# EAGLE board AD8232_Heart_Rate_Monitor-Panel-v10_WINDOW_PANNED_PASTE (EAGLE 7.6.0), part 1 of 2
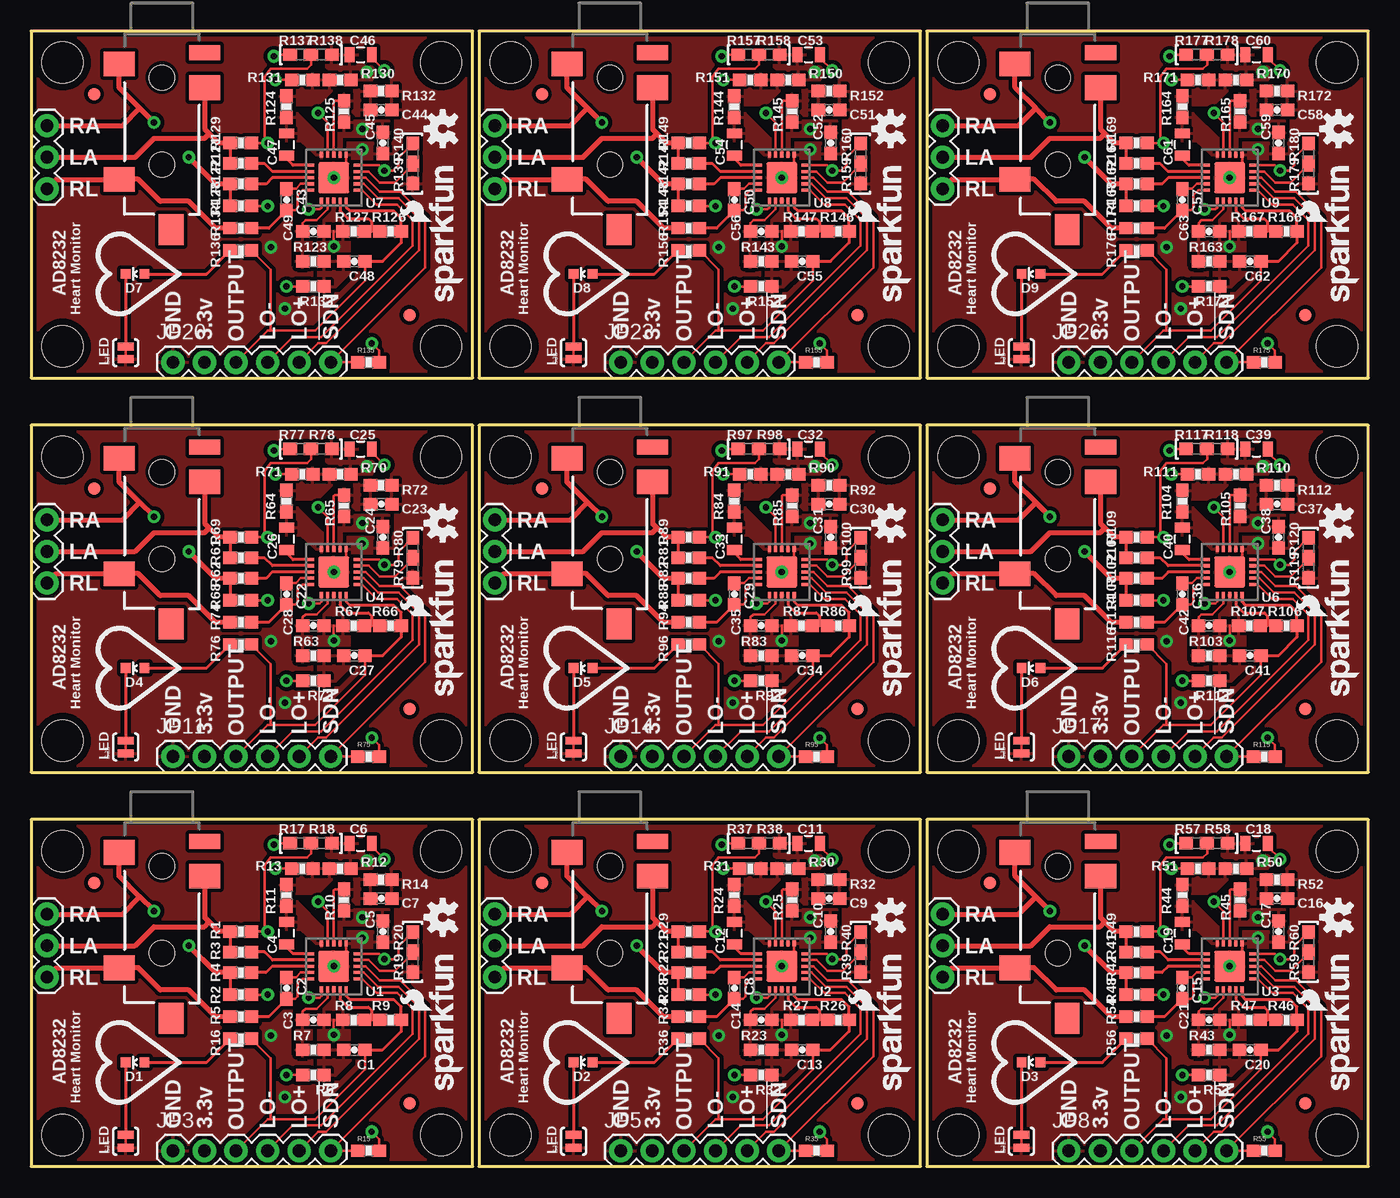
[diagram p0: board, top side]
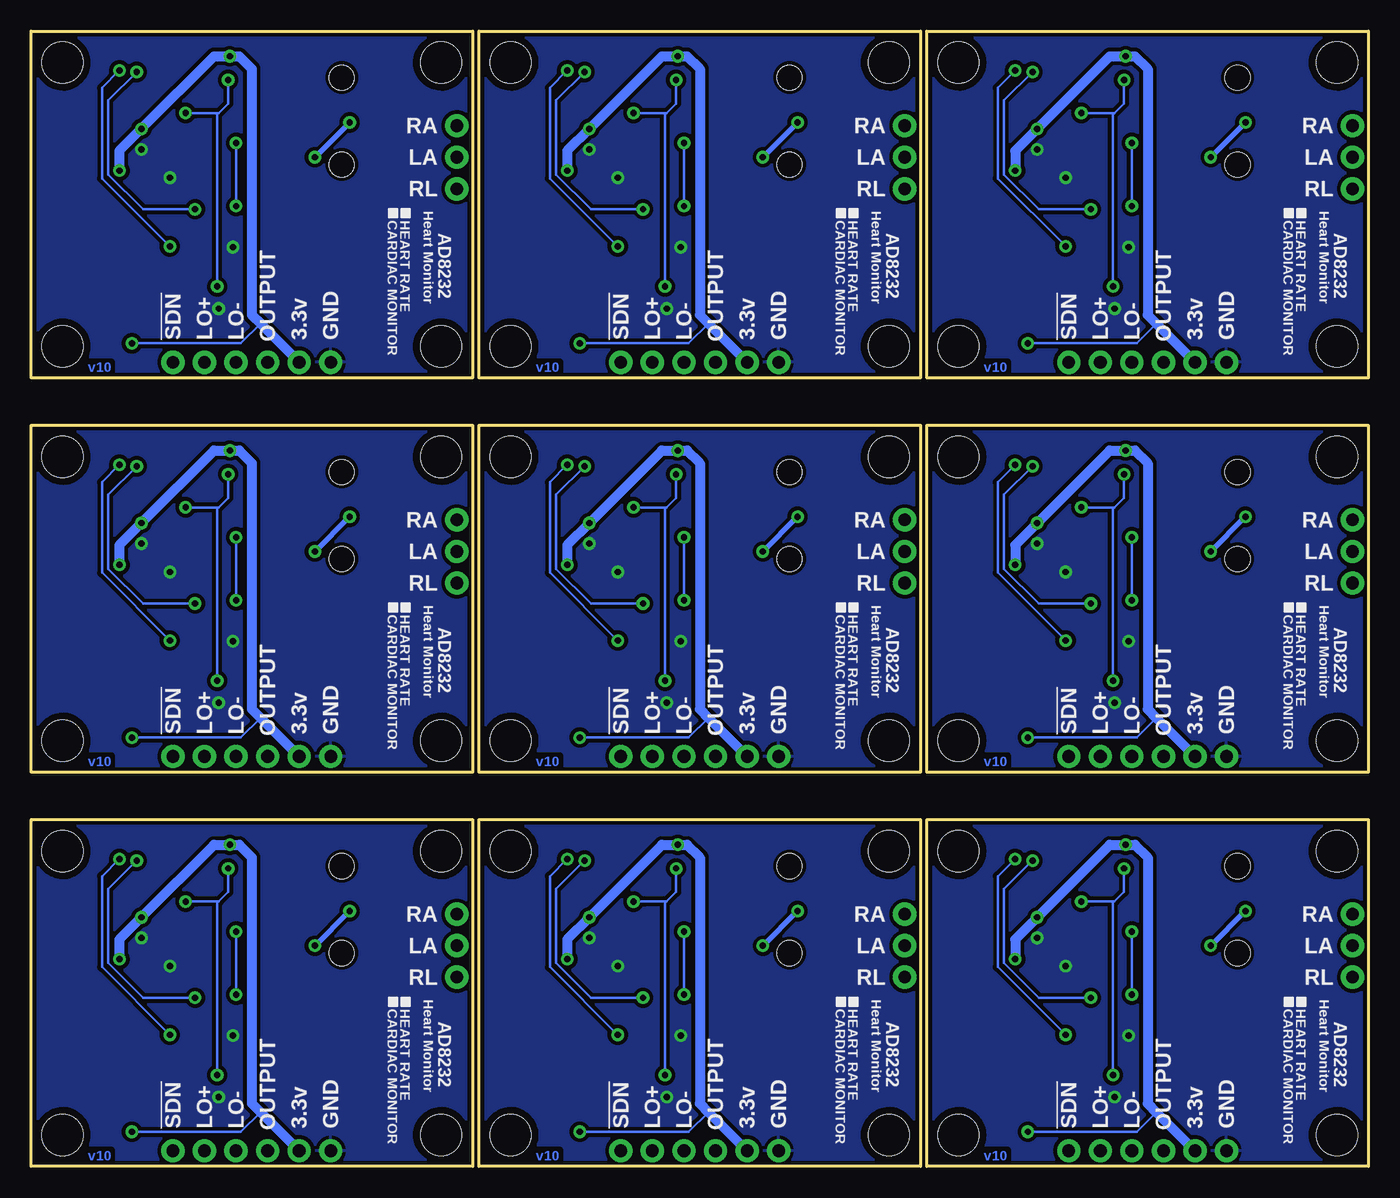
[diagram p1: board, bottom side, seen from below]

Size 107.7 x 91.44 mm. Coordinates in mm from the lower left corner, seen from the top.
Outline: 35.56,0 35.56,27.94 0,27.94 0,0 35.56,0
Outline: 71.63,0 71.63,27.94 36.07,27.94 36.07,0 71.63,0
Outline: 107.7,0 107.7,27.94 72.14,27.94 72.14,0 107.7,0
Outline: 35.56,31.75 35.56,59.69 0,59.69 0,31.75 35.56,31.75
Outline: 71.63,31.75 71.63,59.69 36.07,59.69 36.07,31.75 71.63,31.75
Outline: 107.7,31.75 107.7,59.69 72.14,59.69 72.14,31.75 107.7,31.75
Outline: 35.56,63.5 35.56,91.44 0,91.44 0,63.5 35.56,63.5
Outline: 71.63,63.5 71.63,91.44 36.07,91.44 36.07,63.5 71.63,63.5
Outline: 107.7,63.5 107.7,91.44 72.14,91.44 72.14,63.5 107.7,63.5
Copper layers (1*16): Top 0.035mm / dielectric 1.5mm / Bottom 0.035mm
Design rules "default": minimum track width 7mil, minimum drill 15mil, track to track 6mil, track to pad 8mil, pad to pad 8mil, via to via 8mil, smd to smd 8mil, copper to edge 8mil, drill to drill 8mil, minimum pad ring 12mil, minimum via ring 10mil, stop-mask expansion 4mil, vias tented up to drill 20mil, thermal gap 10mil

## Footprints (pad centres in the part's own frame; a part is rotated, then mirrored left to right if it is on the bottom)
0603-CAP = smd 1.1 x 1: 1 -0.85,0; 2 0.85,0
0805 = smd 0.8 x 1.2: 1 -0.9,0; 2 0.9,0
LED-0603 = smd 0.8 x 0.8: A 0,-0.75; C 0,0.75
FIDUCIAL-1X2 = smd 1 x 1: 1 0,0
1X03 = drill 1.016 pad 1.88: 1 0,0; 2 2.54,0; 3 5.08,0
AUDIO-JACK-3.5MM-SMD = smd 2 x 2.5: RING 4.3,3.45; SLEEVE 2.4,-3.45; TIP 11.7,-3.45 | smd 1.2 x 2.5: RSH 1.5,3.45 | smd 2.5 x 2: TSH 15.75,0.75 | hole 2: 3.5,0; 10.5,0
1X06 = drill 1.016 pad 1.88: 1 0,0; 2 2.54,0; 3 5.08,0; 4 7.62,0; 5 10.16,0; 6 12.7,0
0603-RES = smd 1.1 x 1: 1 -0.85,0; 2 0.85,0
0603 = smd 1.1 x 1: 1 -0.85,0; 2 0.85,0
SJ_2S-TRACE = smd 0.635 x 1.27: 1 -0.508,0; 2 0.508,0
STAND-OFF = hole 3.302: 0,0
LFCSP_20 = smd 0.5 x 0.25: 1 -1.85,1; 2 -1.85,0.5; 3 -1.85,0; 4 -1.85,-0.5; 5 -1.85,-1; 11 1.85,-1; 12 1.85,-0.5; 13 1.85,0; 14 1.85,0.5; 15 1.85,1 | smd 0.25 x 0.5: 6 -1,-1.85; 7 -0.5,-1.85; 8 0,-1.85; 9 0.5,-1.85; 10 1,-1.85; 16 1,1.85; 17 0.5,1.85; 18 0,1.85; 19 -0.5,1.85; 20 -1,1.85 | smd 2.5 x 2.5: PAD 0,0

## Placement (x,y rotation side)
C1  1.5nF  [0603-CAP]  26.04,9.4 180 top
C2  1nF  [0603-CAP]  20.57,14.35 270 top
C3  10nF  [0603-CAP]  22.73,11.81 180 top
C4  0.33uF  [0805]  20.57,18.8 90 top
C5  0.1uF  [0603-CAP]  28.32,18.92 270 top
C6  0.33uF  [0805]  26.54,26.04 0 top
C7  0.1uf  [0603-CAP]  28.19,21.59 0 top
C8  1nF  [0603-CAP]  56.64,14.35 270 top
C9  0.1uf  [0603-CAP]  64.26,21.59 0 top
C10  0.1uF  [0603-CAP]  64.39,18.92 270 top
C11  0.33uF  [0805]  62.61,26.04 0 top
C12  0.33uF  [0805]  56.64,18.8 90 top
C13  1.5nF  [0603-CAP]  62.1,9.4 180 top
C14  10nF  [0603-CAP]  58.8,11.81 180 top
C15  1nF  [0603-CAP]  92.71,14.35 270 top
C16  0.1uf  [0603-CAP]  100.33,21.59 0 top
C17  0.1uF  [0603-CAP]  100.46,18.92 270 top
C18  0.33uF  [0805]  98.68,26.04 0 top
C19  0.33uF  [0805]  92.71,18.8 90 top
C20  1.5nF  [0603-CAP]  98.17,9.4 180 top
C21  10nF  [0603-CAP]  94.87,11.81 180 top
C22  1nF  [0603-CAP]  20.57,46.1 270 top
C23  0.1uf  [0603-CAP]  28.19,53.34 0 top
C24  0.1uF  [0603-CAP]  28.32,50.67 270 top
C25  0.33uF  [0805]  26.54,57.78 0 top
C26  0.33uF  [0805]  20.57,50.55 90 top
C27  1.5nF  [0603-CAP]  26.04,41.15 180 top
C28  10nF  [0603-CAP]  22.73,43.56 180 top
C29  1nF  [0603-CAP]  56.64,46.1 270 top
C30  0.1uf  [0603-CAP]  64.26,53.34 0 top
C31  0.1uF  [0603-CAP]  64.39,50.67 270 top
C32  0.33uF  [0805]  62.61,57.78 0 top
C33  0.33uF  [0805]  56.64,50.55 90 top
C34  1.5nF  [0603-CAP]  62.1,41.15 180 top
C35  10nF  [0603-CAP]  58.8,43.56 180 top
C36  1nF  [0603-CAP]  92.71,46.1 270 top
C37  0.1uf  [0603-CAP]  100.33,53.34 0 top
C38  0.1uF  [0603-CAP]  100.46,50.67 270 top
C39  0.33uF  [0805]  98.68,57.78 0 top
C40  0.33uF  [0805]  92.71,50.55 90 top
C41  1.5nF  [0603-CAP]  98.17,41.15 180 top
C42  10nF  [0603-CAP]  94.87,43.56 180 top
C43  1nF  [0603-CAP]  20.57,77.85 270 top
C44  0.1uf  [0603-CAP]  28.19,85.09 0 top
C45  0.1uF  [0603-CAP]  28.32,82.42 270 top
C46  0.33uF  [0805]  26.54,89.53 0 top
C47  0.33uF  [0805]  20.57,82.3 90 top
C48  1.5nF  [0603-CAP]  26.04,72.9 180 top
C49  10nF  [0603-CAP]  22.73,75.31 180 top
C50  1nF  [0603-CAP]  56.64,77.85 270 top
C51  0.1uf  [0603-CAP]  64.26,85.09 0 top
C52  0.1uF  [0603-CAP]  64.39,82.42 270 top
C53  0.33uF  [0805]  62.61,89.53 0 top
C54  0.33uF  [0805]  56.64,82.3 90 top
C55  1.5nF  [0603-CAP]  62.1,72.9 180 top
C56  10nF  [0603-CAP]  58.8,75.31 180 top
C57  1nF  [0603-CAP]  92.71,77.85 270 top
C58  0.1uf  [0603-CAP]  100.33,85.09 0 top
C59  0.1uF  [0603-CAP]  100.46,82.42 270 top
C60  0.33uF  [0805]  98.68,89.53 0 top
C61  0.33uF  [0805]  92.71,82.3 90 top
C62  1.5nF  [0603-CAP]  98.17,72.9 180 top
C63  10nF  [0603-CAP]  94.87,75.31 180 top
D1  RED  [LED-0603]  8.38,8.38 90 top
D2  RED  [LED-0603]  44.45,8.38 90 top
D3  RED  [LED-0603]  80.52,8.38 90 top
D4  RED  [LED-0603]  8.38,40.13 90 top
D5  RED  [LED-0603]  44.45,40.13 90 top
D6  RED  [LED-0603]  80.52,40.13 90 top
D7  RED  [LED-0603]  8.38,71.88 90 top
D8  RED  [LED-0603]  44.45,71.88 90 top
D9  RED  [LED-0603]  80.52,71.88 90 top
FID1  FIDUCIAL1X2  [FIDUCIAL-1X2]  5.08,22.86 0 top
FID2  FIDUCIAL1X2  [FIDUCIAL-1X2]  30.48,5.08 0 top
FID3  FIDUCIAL1X2  [FIDUCIAL-1X2]  41.15,22.86 0 top
FID4  FIDUCIAL1X2  [FIDUCIAL-1X2]  66.55,5.08 0 top
FID5  FIDUCIAL1X2  [FIDUCIAL-1X2]  77.22,22.86 0 top
FID6  FIDUCIAL1X2  [FIDUCIAL-1X2]  102.62,5.08 0 top
FID7  FIDUCIAL1X2  [FIDUCIAL-1X2]  5.08,54.61 0 top
FID8  FIDUCIAL1X2  [FIDUCIAL-1X2]  30.48,36.83 0 top
FID9  FIDUCIAL1X2  [FIDUCIAL-1X2]  41.15,54.61 0 top
FID10  FIDUCIAL1X2  [FIDUCIAL-1X2]  66.55,36.83 0 top
FID11  FIDUCIAL1X2  [FIDUCIAL-1X2]  77.22,54.61 0 top
FID12  FIDUCIAL1X2  [FIDUCIAL-1X2]  102.62,36.83 0 top
FID13  FIDUCIAL1X2  [FIDUCIAL-1X2]  5.08,86.36 0 top
FID14  FIDUCIAL1X2  [FIDUCIAL-1X2]  30.48,68.58 0 top
FID15  FIDUCIAL1X2  [FIDUCIAL-1X2]  41.15,86.36 0 top
FID16  FIDUCIAL1X2  [FIDUCIAL-1X2]  66.55,68.58 0 top
FID17  FIDUCIAL1X2  [FIDUCIAL-1X2]  77.22,86.36 0 top
FID18  FIDUCIAL1X2  [FIDUCIAL-1X2]  102.62,68.58 0 top
JP1  [1X03]  1.27,15.24 90 top
JP2  [AUDIO-JACK-3.5MM-SMD]  10.54,27.69 270 top
JP3  [1X06]  11.43,1.27 0 top
JP4  [AUDIO-JACK-3.5MM-SMD]  46.61,27.69 270 top
JP5  [1X06]  47.5,1.27 0 top
JP6  [1X03]  37.34,15.24 90 top
JP7  [AUDIO-JACK-3.5MM-SMD]  82.68,27.69 270 top
JP8  [1X06]  83.57,1.27 0 top
JP9  [1X03]  73.41,15.24 90 top
JP10  [AUDIO-JACK-3.5MM-SMD]  10.54,59.44 270 top
JP11  [1X06]  11.43,33.02 0 top
JP12  [1X03]  1.27,46.99 90 top
JP13  [AUDIO-JACK-3.5MM-SMD]  46.61,59.44 270 top
JP14  [1X06]  47.5,33.02 0 top
JP15  [1X03]  37.34,46.99 90 top
JP16  [AUDIO-JACK-3.5MM-SMD]  82.68,59.44 270 top
JP17  [1X06]  83.57,33.02 0 top
JP18  [1X03]  73.41,46.99 90 top
JP19  [AUDIO-JACK-3.5MM-SMD]  10.54,91.19 270 top
JP20  [1X06]  11.43,64.77 0 top
JP21  [1X03]  1.27,78.74 90 top
JP22  [AUDIO-JACK-3.5MM-SMD]  46.61,91.19 270 top
JP23  [1X06]  47.5,64.77 0 top
JP24  [1X03]  37.34,78.74 90 top
JP25  [AUDIO-JACK-3.5MM-SMD]  82.68,91.19 270 top
JP26  [1X06]  83.57,64.77 0 top
JP27  [1X03]  73.41,78.74 90 top
LOGO1  OSHW-LOGOS  [OSHW-LOGO-S]  33.15,20.07 90 top
LOGO2  SFE_LOGO_NAME_FLAME.1_INCH  [SFE_LOGO_NAME_FLAME_.1]  34.92,5.71 90 top
LOGO3  SFE_LOGO_NAME_FLAME.1_INCH  [SFE_LOGO_NAME_FLAME_.1]  70.99,5.71 90 top
LOGO4  OSHW-LOGOS  [OSHW-LOGO-S]  69.22,20.07 90 top
LOGO5  SFE_LOGO_NAME_FLAME.1_INCH  [SFE_LOGO_NAME_FLAME_.1]  107.06,5.71 90 top
LOGO6  OSHW-LOGOS  [OSHW-LOGO-S]  105.28,20.07 90 top
LOGO7  SFE_LOGO_NAME_FLAME.1_INCH  [SFE_LOGO_NAME_FLAME_.1]  34.92,37.47 90 top
LOGO8  OSHW-LOGOS  [OSHW-LOGO-S]  33.15,51.82 90 top
LOGO9  SFE_LOGO_NAME_FLAME.1_INCH  [SFE_LOGO_NAME_FLAME_.1]  70.99,37.47 90 top
LOGO10  OSHW-LOGOS  [OSHW-LOGO-S]  69.22,51.82 90 top
LOGO11  SFE_LOGO_NAME_FLAME.1_INCH  [SFE_LOGO_NAME_FLAME_.1]  107.06,37.47 90 top
LOGO12  OSHW-LOGOS  [OSHW-LOGO-S]  105.28,51.82 90 top
LOGO13  SFE_LOGO_NAME_FLAME.1_INCH  [SFE_LOGO_NAME_FLAME_.1]  34.92,69.22 90 top
LOGO14  OSHW-LOGOS  [OSHW-LOGO-S]  33.15,83.57 90 top
LOGO15  SFE_LOGO_NAME_FLAME.1_INCH  [SFE_LOGO_NAME_FLAME_.1]  70.99,69.22 90 top
LOGO16  OSHW-LOGOS  [OSHW-LOGO-S]  69.22,83.57 90 top
LOGO17  SFE_LOGO_NAME_FLAME.1_INCH  [SFE_LOGO_NAME_FLAME_.1]  107.06,69.22 90 top
LOGO18  OSHW-LOGOS  [OSHW-LOGO-S]  105.28,83.57 90 top
R1  10M  [0603-RES]  16.89,18.92 0 top
R2  10M  [0603-RES]  16.89,13.84 0 top
R3  180k  [0603-RES]  16.89,17.27 0 top
R4  180k  [0603-RES]  16.89,15.62 0 top
R5  360k  [0603-RES]  16.89,12.06 180 top
R6  1M  [0603-RES]  22.73,7.37 180 top
R7  1M  [0603-RES]  22.73,9.4 180 top
R8  100k  [0603-RES]  25.97,11.81 180 top
R9  1M  [0603-RES]  28.96,11.81 180 top
R10  10M  [0603-RES]  25.21,21.46 90 top
R11  10M  [0603-RES]  20.57,21.84 90 top
R12  1.4M  [0603-RES]  24.89,24 0 top
R13  10M  [0603-RES]  21.84,24 0 top
R14  10M  [0603-RES]  28.19,23.11 180 top
R15  10K  [0603-RES]  27.18,1.27 0 top
R16  1k  [0603-RES]  16.89,10.29 0 top
R17  0  [0603]  21.72,26.04 0 top
R18  DNP  [0603]  23.37,26.04 0 top
R19  0  [0603]  30.73,16.51 90 top
R20  DNP  [0603]  30.73,18.03 90 top
R21  180k  [0603-RES]  52.96,17.27 0 top
R22  180k  [0603-RES]  52.96,15.62 0 top
R23  1M  [0603-RES]  58.8,9.4 180 top
R24  10M  [0603-RES]  56.64,21.84 90 top
R25  10M  [0603-RES]  61.28,21.46 90 top
R26  1M  [0603-RES]  65.02,11.81 180 top
R27  100k  [0603-RES]  62.04,11.81 180 top
R28  10M  [0603-RES]  52.96,13.84 0 top
R29  10M  [0603-RES]  52.96,18.92 0 top
R30  1.4M  [0603-RES]  60.96,24 0 top
R31  10M  [0603-RES]  57.91,24 0 top
R32  10M  [0603-RES]  64.26,23.11 180 top
R33  1M  [0603-RES]  58.8,7.37 180 top
R34  360k  [0603-RES]  52.96,12.06 180 top
R35  10K  [0603-RES]  63.25,1.27 0 top
R36  1k  [0603-RES]  52.96,10.29 0 top
R37  0  [0603]  57.78,26.04 0 top
R38  DNP  [0603]  59.44,26.04 0 top
R39  0  [0603]  66.8,16.51 90 top
R40  DNP  [0603]  66.8,18.03 90 top
R41  180k  [0603-RES]  89.03,17.27 0 top
R42  180k  [0603-RES]  89.03,15.62 0 top
R43  1M  [0603-RES]  94.87,9.4 180 top
R44  10M  [0603-RES]  92.71,21.84 90 top
R45  10M  [0603-RES]  97.35,21.46 90 top
R46  1M  [0603-RES]  101.09,11.81 180 top
R47  100k  [0603-RES]  98.11,11.81 180 top
R48  10M  [0603-RES]  89.03,13.84 0 top
R49  10M  [0603-RES]  89.03,18.92 0 top
R50  1.4M  [0603-RES]  97.03,24 0 top
R51  10M  [0603-RES]  93.98,24 0 top
R52  10M  [0603-RES]  100.33,23.11 180 top
R53  1M  [0603-RES]  94.87,7.37 180 top
R54  360k  [0603-RES]  89.03,12.06 180 top
R55  10K  [0603-RES]  99.31,1.27 0 top
R56  1k  [0603-RES]  89.03,10.29 0 top
R57  0  [0603]  93.85,26.04 0 top
R58  DNP  [0603]  95.5,26.04 0 top
R59  0  [0603]  102.87,16.51 90 top
R60  DNP  [0603]  102.87,18.03 90 top
R61  180k  [0603-RES]  16.89,49.02 0 top
R62  180k  [0603-RES]  16.89,47.37 0 top
R63  1M  [0603-RES]  22.73,41.15 180 top
R64  10M  [0603-RES]  20.57,53.59 90 top
R65  10M  [0603-RES]  25.21,53.21 90 top
R66  1M  [0603-RES]  28.96,43.56 180 top
R67  100k  [0603-RES]  25.97,43.56 180 top
R68  10M  [0603-RES]  16.89,45.59 0 top
R69  10M  [0603-RES]  16.89,50.67 0 top
R70  1.4M  [0603-RES]  24.89,55.75 0 top
R71  10M  [0603-RES]  21.84,55.75 0 top
R72  10M  [0603-RES]  28.19,54.86 180 top
R73  1M  [0603-RES]  22.73,39.12 180 top
R74  360k  [0603-RES]  16.89,43.81 180 top
R75  10K  [0603-RES]  27.18,33.02 0 top
R76  1k  [0603-RES]  16.89,42.04 0 top
R77  0  [0603]  21.72,57.78 0 top
R78  DNP  [0603]  23.37,57.78 0 top
R79  0  [0603]  30.73,48.26 90 top
R80  DNP  [0603]  30.73,49.78 90 top
R81  180k  [0603-RES]  52.96,49.02 0 top
R82  180k  [0603-RES]  52.96,47.37 0 top
R83  1M  [0603-RES]  58.8,41.15 180 top
R84  10M  [0603-RES]  56.64,53.59 90 top
R85  10M  [0603-RES]  61.28,53.21 90 top
R86  1M  [0603-RES]  65.02,43.56 180 top
R87  100k  [0603-RES]  62.04,43.56 180 top
R88  10M  [0603-RES]  52.96,45.59 0 top
R89  10M  [0603-RES]  52.96,50.67 0 top
R90  1.4M  [0603-RES]  60.96,55.75 0 top
R91  10M  [0603-RES]  57.91,55.75 0 top
R92  10M  [0603-RES]  64.26,54.86 180 top
R93  1M  [0603-RES]  58.8,39.12 180 top
R94  360k  [0603-RES]  52.96,43.81 180 top
R95  10K  [0603-RES]  63.25,33.02 0 top
R96  1k  [0603-RES]  52.96,42.04 0 top
R97  0  [0603]  57.78,57.78 0 top
R98  DNP  [0603]  59.44,57.78 0 top
R99  0  [0603]  66.8,48.26 90 top
R100  DNP  [0603]  66.8,49.78 90 top
R101  180k  [0603-RES]  89.03,49.02 0 top
R102  180k  [0603-RES]  89.03,47.37 0 top
R103  1M  [0603-RES]  94.87,41.15 180 top
R104  10M  [0603-RES]  92.71,53.59 90 top
R105  10M  [0603-RES]  97.35,53.21 90 top
R106  1M  [0603-RES]  101.09,43.56 180 top
R107  100k  [0603-RES]  98.11,43.56 180 top
R108  10M  [0603-RES]  89.03,45.59 0 top
R109  10M  [0603-RES]  89.03,50.67 0 top
R110  1.4M  [0603-RES]  97.03,55.75 0 top
R111  10M  [0603-RES]  93.98,55.75 0 top
R112  10M  [0603-RES]  100.33,54.86 180 top
R113  1M  [0603-RES]  94.87,39.12 180 top
R114  360k  [0603-RES]  89.03,43.81 180 top
R115  10K  [0603-RES]  99.31,33.02 0 top
R116  1k  [0603-RES]  89.03,42.04 0 top
R117  0  [0603]  93.85,57.78 0 top
R118  DNP  [0603]  95.5,57.78 0 top
R119  0  [0603]  102.87,48.26 90 top
R120  DNP  [0603]  102.87,49.78 90 top
R121  180k  [0603-RES]  16.89,80.77 0 top
R122  180k  [0603-RES]  16.89,79.12 0 top
R123  1M  [0603-RES]  22.73,72.9 180 top
R124  10M  [0603-RES]  20.57,85.34 90 top
R125  10M  [0603-RES]  25.21,84.96 90 top
R126  1M  [0603-RES]  28.96,75.31 180 top
R127  100k  [0603-RES]  25.97,75.31 180 top
R128  10M  [0603-RES]  16.89,77.34 0 top
R129  10M  [0603-RES]  16.89,82.42 0 top
R130  1.4M  [0603-RES]  24.89,87.5 0 top
R131  10M  [0603-RES]  21.84,87.5 0 top
R132  10M  [0603-RES]  28.19,86.61 180 top
R133  1M  [0603-RES]  22.73,70.87 180 top
R134  360k  [0603-RES]  16.89,75.56 180 top
R135  10K  [0603-RES]  27.18,64.77 0 top
R136  1k  [0603-RES]  16.89,73.79 0 top
R137  0  [0603]  21.72,89.53 0 top
R138  DNP  [0603]  23.37,89.53 0 top
R139  0  [0603]  30.73,80.01 90 top
R140  DNP  [0603]  30.73,81.53 90 top
R141  180k  [0603-RES]  52.96,80.77 0 top
R142  180k  [0603-RES]  52.96,79.12 0 top
R143  1M  [0603-RES]  58.8,72.9 180 top
R144  10M  [0603-RES]  56.64,85.34 90 top
R145  10M  [0603-RES]  61.28,84.96 90 top
R146  1M  [0603-RES]  65.02,75.31 180 top
R147  100k  [0603-RES]  62.04,75.31 180 top
R148  10M  [0603-RES]  52.96,77.34 0 top
R149  10M  [0603-RES]  52.96,82.42 0 top
R150  1.4M  [0603-RES]  60.96,87.5 0 top
R151  10M  [0603-RES]  57.91,87.5 0 top
R152  10M  [0603-RES]  64.26,86.61 180 top
R153  1M  [0603-RES]  58.8,70.87 180 top
R154  360k  [0603-RES]  52.96,75.56 180 top
R155  10K  [0603-RES]  63.25,64.77 0 top
R156  1k  [0603-RES]  52.96,73.79 0 top
R157  0  [0603]  57.78,89.53 0 top
R158  DNP  [0603]  59.44,89.53 0 top
R159  0  [0603]  66.8,80.01 90 top
R160  DNP  [0603]  66.8,81.53 90 top
R161  180k  [0603-RES]  89.03,80.77 0 top
R162  180k  [0603-RES]  89.03,79.12 0 top
R163  1M  [0603-RES]  94.87,72.9 180 top
R164  10M  [0603-RES]  92.71,85.34 90 top
R165  10M  [0603-RES]  97.35,84.96 90 top
R166  1M  [0603-RES]  101.09,75.31 180 top
R167  100k  [0603-RES]  98.11,75.31 180 top
R168  10M  [0603-RES]  89.03,77.34 0 top
R169  10M  [0603-RES]  89.03,82.42 0 top
R170  1.4M  [0603-RES]  97.03,87.5 0 top
R171  10M  [0603-RES]  93.98,87.5 0 top
R172  10M  [0603-RES]  100.33,86.61 180 top
R173  1M  [0603-RES]  94.87,70.87 180 top
R174  360k  [0603-RES]  89.03,75.56 180 top
R175  10K  [0603-RES]  99.31,64.77 0 top
R176  1k  [0603-RES]  89.03,73.79 0 top
R177  0  [0603]  93.85,89.53 0 top
R178  DNP  [0603]  95.5,89.53 0 top
R179  0  [0603]  102.87,80.01 90 top
R180  DNP  [0603]  102.87,81.53 90 top
SJ1  LED DISABLE  [SJ_2S-TRACE]  43.69,2.03 90 top
SJ2  LED DISABLE  [SJ_2S-TRACE]  79.76,2.03 90 top
SJ3  LED DISABLE  [SJ_2S-TRACE]  7.62,33.78 90 top
SJ4  LED DISABLE  [SJ_2S-TRACE]  7.62,2.03 90 top
SJ5  LED DISABLE  [SJ_2S-TRACE]  43.69,33.78 90 top
SJ6  LED DISABLE  [SJ_2S-TRACE]  79.76,33.78 90 top
SJ7  LED DISABLE  [SJ_2S-TRACE]  7.62,65.53 90 top
SJ8  LED DISABLE  [SJ_2S-TRACE]  43.69,65.53 90 top
SJ9  LED DISABLE  [SJ_2S-TRACE]  79.76,65.53 90 top
STANDOFF1  STAND-OFF  [STAND-OFF]  2.54,25.4 0 top
STANDOFF2  STAND-OFF  [STAND-OFF]  33.02,25.4 0 top
STANDOFF3  STAND-OFF  [STAND-OFF]  33.02,2.54 0 top
STANDOFF4  STAND-OFF  [STAND-OFF]  2.54,2.54 0 top
STANDOFF5  STAND-OFF  [STAND-OFF]  38.61,2.54 0 top
STANDOFF6  STAND-OFF  [STAND-OFF]  69.09,2.54 0 top
STANDOFF7  STAND-OFF  [STAND-OFF]  38.61,25.4 0 top
STANDOFF8  STAND-OFF  [STAND-OFF]  69.09,25.4 0 top
STANDOFF9  STAND-OFF  [STAND-OFF]  74.68,2.54 0 top
STANDOFF10  STAND-OFF  [STAND-OFF]  105.16,2.54 0 top
STANDOFF11  STAND-OFF  [STAND-OFF]  74.68,25.4 0 top
STANDOFF12  STAND-OFF  [STAND-OFF]  105.16,25.4 0 top
STANDOFF13  STAND-OFF  [STAND-OFF]  2.54,34.29 0 top
STANDOFF14  STAND-OFF  [STAND-OFF]  33.02,34.29 0 top
STANDOFF15  STAND-OFF  [STAND-OFF]  2.54,57.15 0 top
STANDOFF16  STAND-OFF  [STAND-OFF]  33.02,57.15 0 top
STANDOFF17  STAND-OFF  [STAND-OFF]  38.61,34.29 0 top
STANDOFF18  STAND-OFF  [STAND-OFF]  69.09,34.29 0 top
STANDOFF19  STAND-OFF  [STAND-OFF]  38.61,57.15 0 top
STANDOFF20  STAND-OFF  [STAND-OFF]  69.09,57.15 0 top
STANDOFF21  STAND-OFF  [STAND-OFF]  74.68,34.29 0 top
STANDOFF22  STAND-OFF  [STAND-OFF]  105.16,34.29 0 top
STANDOFF23  STAND-OFF  [STAND-OFF]  74.68,57.15 0 top
STANDOFF24  STAND-OFF  [STAND-OFF]  105.16,57.15 0 top
STANDOFF25  STAND-OFF  [STAND-OFF]  2.54,66.04 0 top
STANDOFF26  STAND-OFF  [STAND-OFF]  33.02,66.04 0 top
STANDOFF27  STAND-OFF  [STAND-OFF]  2.54,88.9 0 top
STANDOFF28  STAND-OFF  [STAND-OFF]  33.02,88.9 0 top
STANDOFF29  STAND-OFF  [STAND-OFF]  38.61,66.04 0 top
STANDOFF30  STAND-OFF  [STAND-OFF]  69.09,66.04 0 top
STANDOFF31  STAND-OFF  [STAND-OFF]  38.61,88.9 0 top
STANDOFF32  STAND-OFF  [STAND-OFF]  69.09,88.9 0 top
STANDOFF33  STAND-OFF  [STAND-OFF]  74.68,66.04 0 top
STANDOFF34  STAND-OFF  [STAND-OFF]  105.16,66.04 0 top
STANDOFF35  STAND-OFF  [STAND-OFF]  74.68,88.9 0 top
STANDOFF36  STAND-OFF  [STAND-OFF]  105.16,88.9 0 top
U1  AD8232  [LFCSP_20]  24.38,16.13 0 top
U2  AD8232  [LFCSP_20]  60.45,16.13 0 top
U3  AD8232  [LFCSP_20]  96.52,16.13 0 top
U4  AD8232  [LFCSP_20]  24.38,47.88 0 top
U5  AD8232  [LFCSP_20]  60.45,47.88 0 top
U6  AD8232  [LFCSP_20]  96.52,47.88 0 top
U7  AD8232  [LFCSP_20]  24.38,79.63 0 top
U8  AD8232  [LFCSP_20]  60.45,79.63 0 top
U9  AD8232  [LFCSP_20]  96.52,79.63 0 top

## Library data of the parts
C1-C3 C5 C7-C10 C13-C17 C20-C24 C27-C31 C34-C38 C41-C45 C48-C52 C55-C59 C62 C63 R1-R14 R21-R34 R41-R54 R61-R74 R81-R94 R101-R114 R121-R134 R141-R154 R161-R174 SJ1-SJ9 = SparkFun-Passives
C4 C6 C11 C12 C18 C19 C25 C26 C32 C33 C39 C40 C46 C47 C53 C54 C60 C61 = SparkFun-Capacitors
D1-D9 = SparkFun-LED; PROD_ID: DIO-00819
FID1-FID18 LOGO1-LOGO18 = SparkFun-Aesthetics
JP1 JP3 JP5 JP6 JP8 JP9 JP11 JP12 JP14 JP15 JP17 JP18 JP20 JP21 JP23 JP24 JP26 JP27 = SparkFun-Connectors
JP2 JP4 JP7 JP10 JP13 JP16 JP19 JP22 JP25 = SparkFun-Connectors; PROD_ID: CONN-10353
R15 R35 R55 R75 R95 R115 R135 R155 R175 = SparkFun-Resistors; PROD_ID: RES-00824
R16 R36 R56 R76 R96 R116 R136 R156 R176 = SparkFun-Resistors; PROD_ID: RES-07856
R17-R20 R37-R40 R57-R60 R77-R80 R97-R100 R117-R120 R137-R140 R157-R160 R177-R180 = SparkFun-Resistors; PROD_ID: RES-08609
STANDOFF1-STANDOFF36 = SparkFun-Electromechanical
U1-U9 = AD8232-TEMP

## Nets
3.3V: C5.1 JP3.2 R10.1 R15.2 R17.1 R20.2 U1.15 U1.17
3.3V1: C10.1 JP5.2 R25.1 R35.2 R37.1 R40.2 U2.15 U2.17
3.3V2: C17.1 JP8.2 R45.1 R55.2 R57.1 R60.2 U3.15 U3.17
3.3V3: C24.1 JP11.2 R65.1 R75.2 R77.1 R80.2 U4.15 U4.17
3.3V4: C31.1 JP14.2 R85.1 R95.2 R97.1 R100.2 U5.15 U5.17
3.3V5: C38.1 JP17.2 R105.1 R115.2 R117.1 R120.2 U6.15 U6.17
3.3V6: C45.1 JP20.2 R125.1 R135.2 R137.1 R140.2 U7.15 U7.17
3.3V7: C52.1 JP23.2 R145.1 R155.2 R157.1 R160.2 U8.15 U8.17
3.3V8: C59.1 JP26.2 R165.1 R175.2 R177.1 R180.2 U9.15 U9.17
GND: C5.2 C7.2 JP3.1 R14.1 R19.1 SJ4.1 U1.16 U1.PAD
GND1: C9.2 C10.2 JP5.1 R32.1 R39.1 SJ1.1 U2.16 U2.PAD
GND2: C16.2 C17.2 JP8.1 R52.1 R59.1 SJ2.1 U3.16 U3.PAD
GND3: C23.2 C24.2 JP11.1 R72.1 R79.1 SJ3.1 U4.16 U4.PAD
GND4: C30.2 C31.2 JP14.1 R92.1 R99.1 SJ5.1 U5.16 U5.PAD
GND5: C37.2 C38.2 JP17.1 R112.1 R119.1 SJ6.1 U6.16 U6.PAD
GND6: C44.2 C45.2 JP20.1 R132.1 R139.1 SJ7.1 U7.16 U7.PAD
GND7: C51.2 C52.2 JP23.1 R152.1 R159.1 SJ8.1 U8.16 U8.PAD
GND8: C58.2 C59.2 JP26.1 R172.1 R179.1 SJ9.1 U9.16 U9.PAD
LA: JP1.2 JP2.RING R1.1 R3.1
LA1: JP4.RING JP6.2 R21.1 R29.1
LA2: JP7.RING JP9.2 R41.1 R49.1
LA3: JP10.RING JP12.2 R61.1 R69.1
LA4: JP13.RING JP15.2 R81.1 R89.1
LA5: JP16.RING JP18.2 R101.1 R109.1
LA6: JP19.RING JP21.2 R121.1 R129.1
LA7: JP22.RING JP24.2 R141.1 R149.1
LA8: JP25.RING JP27.2 R161.1 R169.1
LO+: JP3.5 U1.12
LO+1: JP5.5 U2.12
LO+2: JP8.5 U3.12
LO+3: JP11.5 U4.12
LO+4: JP14.5 U5.12
LO+5: JP17.5 U6.12
LO+6: JP20.5 U7.12
LO+7: JP23.5 U8.12
LO+8: JP26.5 U9.12
LO-: JP3.4 U1.11
LO-1: JP5.4 U2.11
LO-2: JP8.4 U3.11
LO-3: JP11.4 U4.11
LO-4: JP14.4 U5.11
LO-5: JP17.4 U6.11
LO-6: JP20.4 U7.11
LO-7: JP23.4 U8.11
LO-8: JP26.4 U9.11
N$1: R3.2 U1.2
N$2: R4.2 U1.3
N$3: C3.2 R7.2 U1.7
N$4: C4.2 R11.1 U1.20
N$5: C7.1 R10.2 R14.2 U1.18
N$6: D1.A R16.1
N$7: R8.1 R9.2 U1.9
N$8: R6.2 R13.1 U1.19
N$9: C1.2 R6.1 R7.1
N$10: D1.C SJ4.2
N$11: R19.2 R20.1 U1.14
N$12: R21.2 U2.2
N$13: C4.1 U1.1
N$14: R11.2 R12.1 R13.2
N$15: R22.2 U2.3
N$16: C6.1 R12.2 R18.2 U1.6
N$17: C2.1 U1.4
N$18: C2.2 R5.1 U1.5
N$19: C14.2 R23.2 U2.7
N$20: R1.2 R2.2 R17.2 R18.1
N$21: C12.2 R24.1 U2.20
N$22: C9.1 R25.2 R32.2 U2.18
N$23: R26.2 R27.1 U2.9
N$24: C12.1 U2.1
N$25: R24.2 R30.1 R31.2
N$26: C11.1 R30.2 R38.2 U2.6
N$27: C8.1 U2.4
N$28: C13.2 R23.1 R33.1
N$29: C8.2 R34.1 U2.5
N$30: R31.1 R33.2 U2.19
N$31: R28.2 R29.2 R37.2 R38.1
N$32: D2.A R36.1
N$33: D2.C SJ1.2
N$34: R39.2 R40.1 U2.14
N$35: R41.2 U3.2
N$36: R42.2 U3.3
N$37: C21.2 R43.2 U3.7
N$38: C19.2 R44.1 U3.20
N$39: C16.1 R45.2 R52.2 U3.18
N$40: R46.2 R47.1 U3.9
N$41: C19.1 U3.1
N$42: R44.2 R50.1 R51.2
N$43: C18.1 R50.2 R58.2 U3.6
N$44: C15.1 U3.4
N$45: C20.2 R43.1 R53.1
N$46: C15.2 R54.1 U3.5
N$47: R51.1 R53.2 U3.19
N$48: R48.2 R49.2 R57.2 R58.1
N$49: D3.A R56.1
N$50: D3.C SJ2.2
N$51: R59.2 R60.1 U3.14
N$52: R61.2 U4.2
N$53: R62.2 U4.3
N$54: C28.2 R63.2 U4.7
N$55: C26.2 R64.1 U4.20
N$56: C23.1 R65.2 R72.2 U4.18
N$57: R66.2 R67.1 U4.9
N$58: C26.1 U4.1
N$59: R64.2 R70.1 R71.2
N$60: C25.1 R70.2 R78.2 U4.6
N$61: C22.1 U4.4
N$62: C27.2 R63.1 R73.1
N$63: C22.2 R74.1 U4.5
N$64: R71.1 R73.2 U4.19
N$65: R68.2 R69.2 R77.2 R78.1
N$66: D4.A R76.1
N$67: D4.C SJ3.2
N$68: R79.2 R80.1 U4.14
N$69: R81.2 U5.2
N$70: R82.2 U5.3
N$71: C35.2 R83.2 U5.7
N$72: C33.2 R84.1 U5.20
N$73: C30.1 R85.2 R92.2 U5.18
N$74: R86.2 R87.1 U5.9
N$75: C33.1 U5.1
N$76: R84.2 R90.1 R91.2
N$77: C32.1 R90.2 R98.2 U5.6
N$78: C29.1 U5.4
N$79: C34.2 R83.1 R93.1
N$80: C29.2 R94.1 U5.5
N$81: R91.1 R93.2 U5.19
N$82: R88.2 R89.2 R97.2 R98.1
N$83: D5.A R96.1
N$84: D5.C SJ5.2
N$85: R99.2 R100.1 U5.14
N$86: R101.2 U6.2
N$87: R102.2 U6.3
N$88: C42.2 R103.2 U6.7
N$89: C40.2 R104.1 U6.20
N$90: C37.1 R105.2 R112.2 U6.18
N$91: R106.2 R107.1 U6.9
N$92: C40.1 U6.1
N$93: R104.2 R110.1 R111.2
N$94: C39.1 R110.2 R118.2 U6.6
N$95: C36.1 U6.4
N$96: C41.2 R103.1 R113.1
N$97: C36.2 R114.1 U6.5
N$98: R111.1 R113.2 U6.19
N$99: R108.2 R109.2 R117.2 R118.1
N$100: D6.A R116.1
N$101: D6.C SJ6.2
N$102: R119.2 R120.1 U6.14
N$103: R121.2 U7.2
N$104: R122.2 U7.3
N$105: C49.2 R123.2 U7.7
N$106: C47.2 R124.1 U7.20
N$107: C44.1 R125.2 R132.2 U7.18
N$108: R126.2 R127.1 U7.9
N$109: C47.1 U7.1
N$110: R124.2 R130.1 R131.2
N$111: C46.1 R130.2 R138.2 U7.6
N$112: C43.1 U7.4
N$113: C48.2 R123.1 R133.1
N$114: C43.2 R134.1 U7.5
N$115: R131.1 R133.2 U7.19
N$116: R128.2 R129.2 R137.2 R138.1
N$117: D7.A R136.1
N$118: D7.C SJ7.2
N$119: R139.2 R140.1 U7.14
N$120: R141.2 U8.2
N$121: R142.2 U8.3
N$122: C56.2 R143.2 U8.7
N$123: C54.2 R144.1 U8.20
N$124: C51.1 R145.2 R152.2 U8.18
N$125: R146.2 R147.1 U8.9
N$126: C54.1 U8.1
N$127: R144.2 R150.1 R151.2
N$128: C53.1 R150.2 R158.2 U8.6
N$129: C50.1 U8.4
N$130: C55.2 R143.1 R153.1
N$131: C50.2 R154.1 U8.5
N$132: R151.1 R153.2 U8.19
N$133: R148.2 R149.2 R157.2 R158.1
N$134: D8.A R156.1
N$135: D8.C SJ8.2
N$136: R159.2 R160.1 U8.14
N$137: R161.2 U9.2
N$138: R162.2 U9.3
N$139: C63.2 R163.2 U9.7
N$140: C61.2 R164.1 U9.20
N$141: C58.1 R165.2 R172.2 U9.18
N$142: R166.2 R167.1 U9.9
N$143: C61.1 U9.1
N$144: R164.2 R170.1 R171.2
N$145: C60.1 R170.2 R178.2 U9.6
N$146: C57.1 U9.4
N$147: C62.2 R163.1 R173.1
N$148: C57.2 R174.1 U9.5
N$149: R171.1 R173.2 U9.19
N$150: R168.2 R169.2 R177.2 R178.1
N$151: D9.A R176.1
N$152: D9.C SJ9.2
N$153: R179.2 R180.1 U9.14
RA: JP1.3 JP2.SLEEVE R2.1 R4.1
RA1: JP4.SLEEVE JP6.3 R22.1 R28.1
RA2: JP7.SLEEVE JP9.3 R42.1 R48.1
RA3: JP10.SLEEVE JP12.3 R62.1 R68.1
RA4: JP13.SLEEVE JP15.3 R82.1 R88.1
RA5: JP16.SLEEVE JP18.3 R102.1 R108.1
RA6: JP19.SLEEVE JP21.3 R122.1 R128.1
RA7: JP22.SLEEVE JP24.3 R142.1 R148.1
RA8: JP25.SLEEVE JP27.3 R162.1 R168.1
REFOUT: C3.1 C6.2 R8.2 U1.8
REFOUT1: C11.2 C14.1 R27.2 U2.8
REFOUT2: C18.2 C21.1 R47.2 U3.8
REFOUT3: C25.2 C28.1 R67.2 U4.8
REFOUT4: C32.2 C35.1 R87.2 U5.8
REFOUT5: C39.2 C42.1 R107.2 U6.8
REFOUT6: C46.2 C49.1 R127.2 U7.8
REFOUT7: C53.2 C56.1 R147.2 U8.8
REFOUT8: C60.2 C63.1 R167.2 U9.8
RL: JP1.1 JP2.TIP R5.2
RL1: JP4.TIP JP6.1 R34.2
RL2: JP7.TIP JP9.1 R54.2
RL3: JP10.TIP JP12.1 R74.2
RL4: JP13.TIP JP15.1 R94.2
RL5: JP16.TIP JP18.1 R114.2
RL6: JP19.TIP JP21.1 R134.2
RL7: JP22.TIP JP24.1 R154.2
RL8: JP25.TIP JP27.1 R174.2
SDN: JP3.6 R15.1 U1.13
SDN1: JP5.6 R35.1 U2.13
SDN2: JP8.6 R55.1 U3.13
SDN3: JP11.6 R75.1 U4.13
SDN4: JP14.6 R95.1 U5.13
SDN5: JP17.6 R115.1 U6.13
SDN6: JP20.6 R135.1 U7.13
SDN7: JP23.6 R155.1 U8.13
SDN8: JP26.6 R175.1 U9.13
SIGNAL_OUT: C1.1 JP3.3 R9.1 R16.2 U1.10
SIGNAL_OUT1: C13.1 JP5.3 R26.1 R36.2 U2.10
SIGNAL_OUT2: C20.1 JP8.3 R46.1 R56.2 U3.10
SIGNAL_OUT3: C27.1 JP11.3 R66.1 R76.2 U4.10
SIGNAL_OUT4: C34.1 JP14.3 R86.1 R96.2 U5.10
SIGNAL_OUT5: C41.1 JP17.3 R106.1 R116.2 U6.10
SIGNAL_OUT6: C48.1 JP20.3 R126.1 R136.2 U7.10
SIGNAL_OUT7: C55.1 JP23.3 R146.1 R156.2 U8.10
SIGNAL_OUT8: C62.1 JP26.3 R166.1 R176.2 U9.10